# EAGLE board MPR121-Cap-Touch-Keypad_Panel_v13a (EAGLE 7.4.0), part 1 of 2
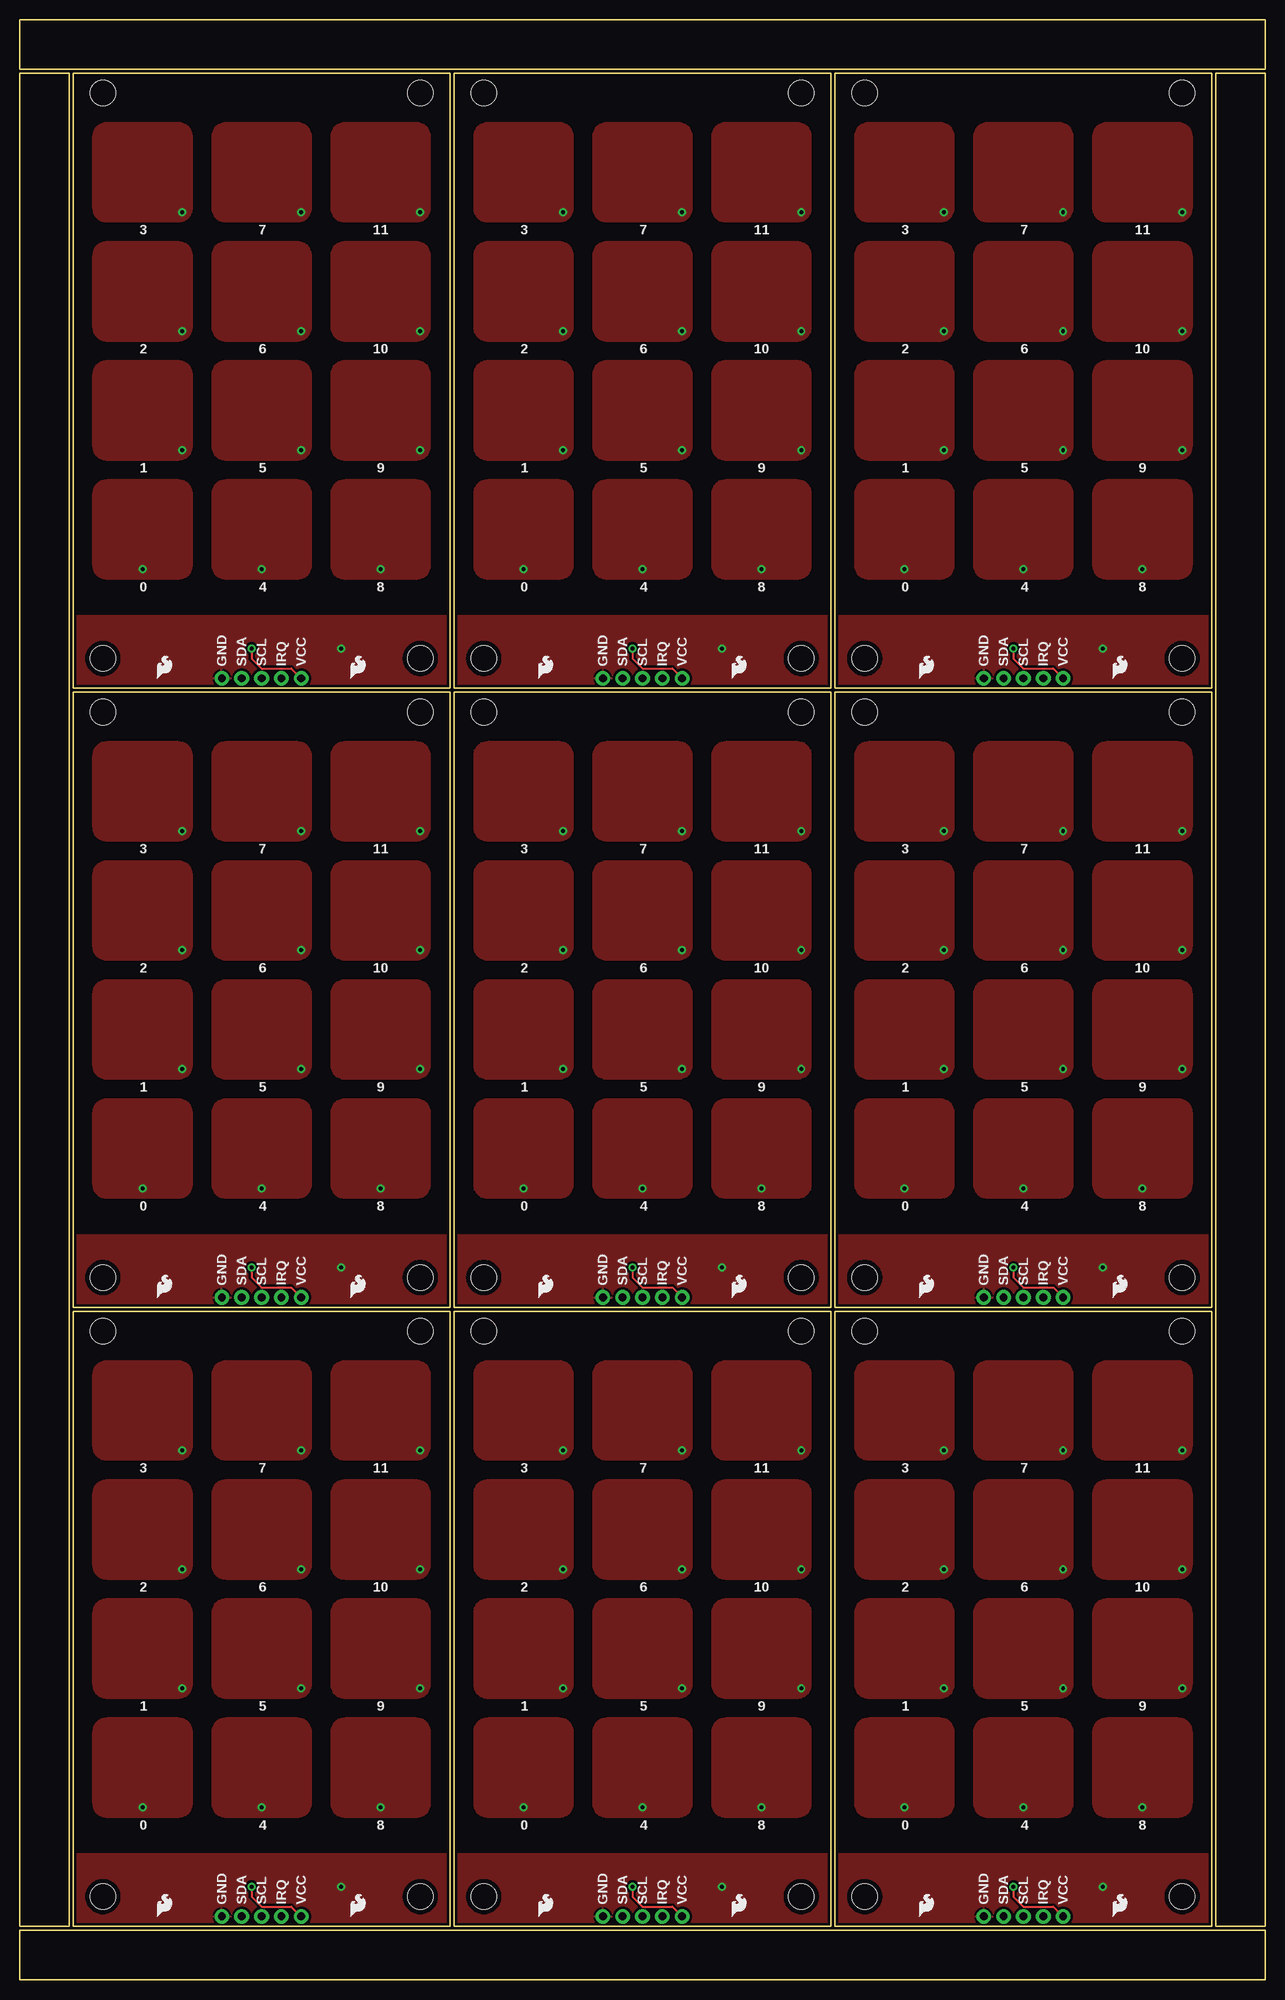
[diagram p0: board, top side]
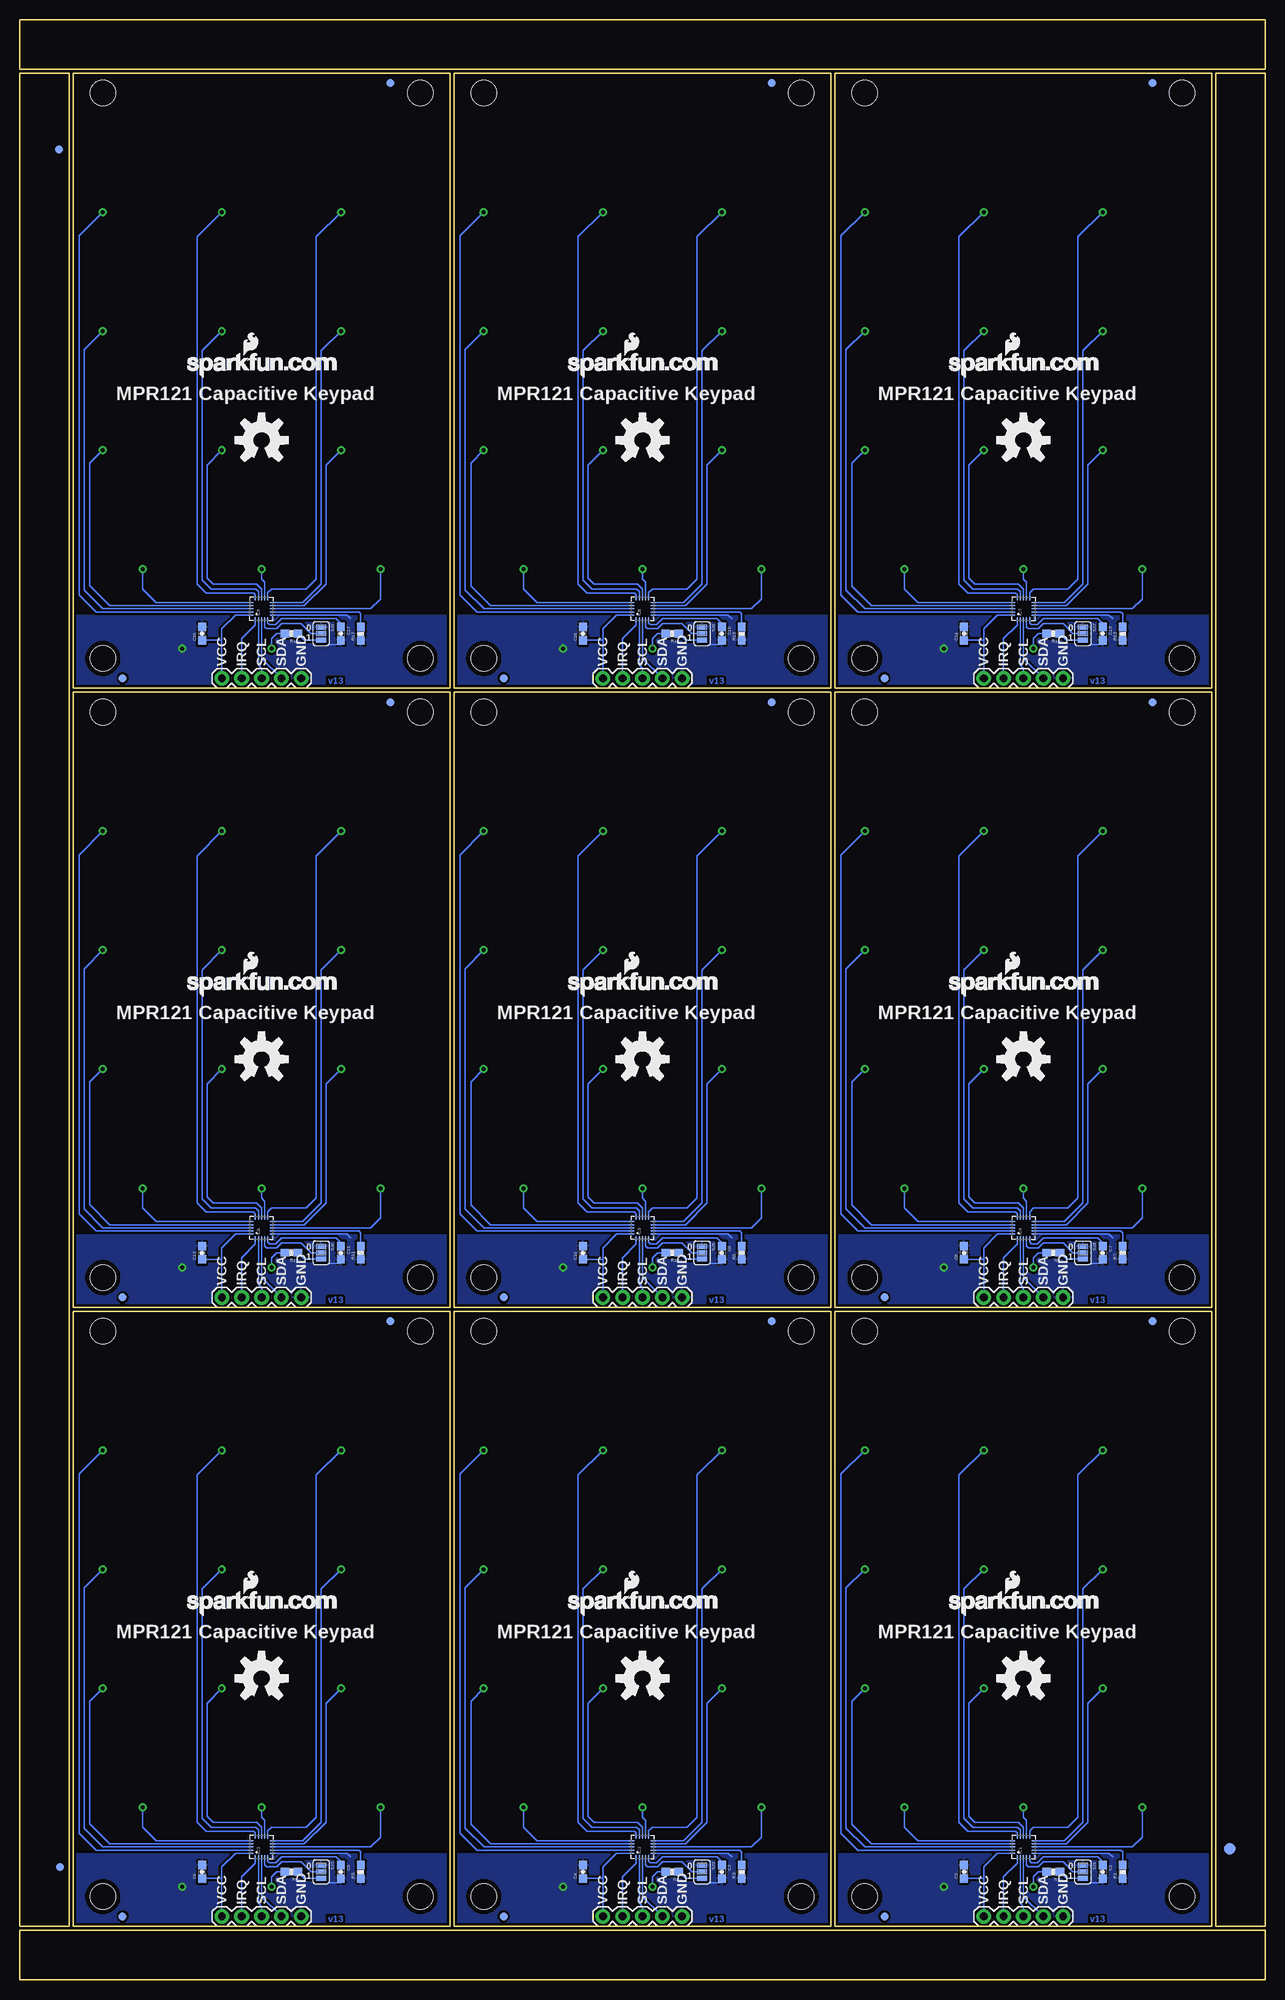
[diagram p1: board, bottom side, seen from below]

Size 159.51 x 250.95 mm. Coordinates in mm from the lower left corner, seen from the top.
Outline: 6.35,79.25 6.35,6.86 0,6.86 0,29.72
Outline: 0,27.18 0,244.09 6.35,244.09 6.35,76.71
Outline: 79.25,0 0,0 0,6.35 29.72,6.35
Outline: 27.18,6.35 159.51,6.35 159.51,0 76.71,0
Outline: 159.51,79.25 159.51,6.86 153.16,6.86 153.16,29.72
Outline: 153.16,27.18 153.16,244.09 159.51,244.09 159.51,76.71
Outline: 80.26,250.95 159.51,250.95 159.51,244.6 129.79,244.6
Outline: 132.33,244.6 0,244.6 0,250.95 82.8,250.95
Outline: 55.12,6.86 6.86,6.86 6.86,85.6 55.12,85.6 55.12,6.86
Outline: 103.89,6.86 55.63,6.86 55.63,85.6 103.89,85.6 103.89,6.86
Outline: 152.65,6.86 104.39,6.86 104.39,85.6 152.65,85.6 152.65,6.86
Outline: 55.12,86.11 6.86,86.11 6.86,164.85 55.12,164.85 55.12,86.11
Outline: 103.89,86.11 55.63,86.11 55.63,164.85 103.89,164.85 103.89,86.11
Outline: 152.65,86.11 104.39,86.11 104.39,164.85 152.65,164.85 152.65,86.11
Outline: 55.12,165.35 6.86,165.35 6.86,244.09 55.12,244.09 55.12,165.35
Outline: 103.89,165.35 55.63,165.35 55.63,244.09 103.89,244.09 103.89,165.35
Outline: 152.65,165.35 104.39,165.35 104.39,244.09 152.65,244.09 152.65,165.35
Copper layers (1*16): Top 0.035mm / dielectric 1.5mm / Bottom 0.035mm
Design rules "SparkFun *": minimum track width 8mil, minimum drill 20mil, track to track 8mil, track to pad 8mil, pad to pad 8mil, via to via 8mil, smd to smd 8mil, copper to edge 8mil, drill to drill 8mil, minimum pad ring 12mil, minimum via ring 10mil, stop-mask expansion 4mil, vias tented up to drill 20mil, thermal gap 10mil

## Footprints (pad centres in the part's own frame; a part is rotated, then mirrored left to right if it is on the bottom)
0603-CAP = smd 1.1 x 1: 1 -0.85,0; 2 0.85,0
FIDUCIAL-1X2 = smd 1 x 1: 1 0,0
FIDUCIAL-1.5X3 = smd 1.5 x 1.5: 1 0,0
QFN-20-0.4MM-V2 = smd 0.75 x 0.195: 1 -1.367,0.8; 2 -1.367,0.4; 3 -1.367,0; 4 -1.367,-0.4; 5 -1.367,-0.8; 11 1.375,-0.8; 12 1.375,-0.4; 13 1.375,0; 14 1.375,0.4; 15 1.375,0.8 | smd 0.195 x 0.75: 6 -0.795,-1.372; 7 -0.395,-1.372; 8 0.005,-1.372; 9 0.405,-1.372; 10 0.805,-1.372; 16 0.81,1.372; 17 0.41,1.372; 18 0.01,1.372; 19 -0.39,1.372; 20 -0.79,1.372
STAND-OFF = hole 3.302: 0,0
1X05 = drill 1.016 pad 1.88: 1 0,0; 2 2.54,0; 3 5.08,0; 4 7.62,0; 5 10.16,0
0603-RES = smd 1.1 x 1: 1 -0.85,0; 2 0.85,0
SJ_3_PASTE1&2 = smd 0.635 x 1.27: 1 -0.813,0; 2 0,0; 3 0.813,0

## Placement (x,y rotation side)
C1  0.1uF  [0603-CAP]  20.83,13.84 270 bottom
C2  0.1uF  [0603-CAP]  38.61,13.84 90 bottom
C3  0.1uF  [0603-CAP]  69.6,13.84 270 bottom
C4  0.1uF  [0603-CAP]  87.38,13.84 90 bottom
C5  0.1uF  [0603-CAP]  118.36,13.84 270 bottom
C6  0.1uF  [0603-CAP]  136.14,13.84 90 bottom
C7  0.1uF  [0603-CAP]  20.83,93.09 270 bottom
C8  0.1uF  [0603-CAP]  38.61,93.09 90 bottom
C9  0.1uF  [0603-CAP]  69.6,93.09 270 bottom
C10  0.1uF  [0603-CAP]  87.38,93.09 90 bottom
C11  0.1uF  [0603-CAP]  118.36,93.09 270 bottom
C12  0.1uF  [0603-CAP]  136.14,93.09 90 bottom
C13  0.1uF  [0603-CAP]  20.83,172.34 270 bottom
C14  0.1uF  [0603-CAP]  38.61,172.34 90 bottom
C15  0.1uF  [0603-CAP]  69.6,172.34 270 bottom
C16  0.1uF  [0603-CAP]  87.38,172.34 90 bottom
C17  0.1uF  [0603-CAP]  118.36,172.34 270 bottom
C18  0.1uF  [0603-CAP]  136.14,172.34 90 bottom
E$1  [FIDUCIAL-1X2]  154.31,14.48 0 bottom
E$2  [FIDUCIAL-1.5X3]  4.57,16.76 0 bottom
E$7  [FIDUCIAL-1X2]  154.43,234.31 90 bottom
IC1  MPR121  [QFN-20-0.4MM-V2]  30.99,17.02 90 bottom
IC2  MPR121  [QFN-20-0.4MM-V2]  79.76,17.02 90 bottom
IC3  MPR121  [QFN-20-0.4MM-V2]  128.52,17.02 90 bottom
IC4  MPR121  [QFN-20-0.4MM-V2]  30.99,96.27 90 bottom
IC5  MPR121  [QFN-20-0.4MM-V2]  79.76,96.27 90 bottom
IC6  MPR121  [QFN-20-0.4MM-V2]  128.52,96.27 90 bottom
IC7  MPR121  [QFN-20-0.4MM-V2]  30.99,175.51 90 bottom
IC8  MPR121  [QFN-20-0.4MM-V2]  79.76,175.51 90 bottom
IC9  MPR121  [QFN-20-0.4MM-V2]  128.52,175.51 90 bottom
JP1  LOGO-SFENEW  [SFE-NEW-WEBLOGO]  40.51,46.61 0 bottom
JP2  LOGO-SFESK  [SFE-LOGO-FLAME]  17.65,8.13 0 top
JP3  STAND-OFF  [STAND-OFF]  51.31,10.67 0 bottom
JP4  STAND-OFF  [STAND-OFF]  10.67,10.67 0 bottom
JP5  FIDUCIAL1X2  [FIDUCIAL-1X2]  14.48,84.33 0 bottom
JP6  LOGO-SFESK  [SFE-LOGO-FLAME]  42.42,8.13 0 top
JP7  STAND-OFF  [STAND-OFF]  51.31,83.06 0 bottom
JP8  STAND-OFF  [STAND-OFF]  10.67,83.06 0 bottom
JP9  [1X05]  25.91,8.13 180 bottom
JP10  FIDUCIAL1X2  [FIDUCIAL-1X2]  48.77,8.13 0 bottom
JP11  LOGO-SFENEW  [SFE-NEW-WEBLOGO]  89.28,46.61 0 bottom
JP12  STAND-OFF  [STAND-OFF]  100.08,10.67 0 bottom
JP13  STAND-OFF  [STAND-OFF]  59.44,10.67 0 bottom
JP14  LOGO-SFESK  [SFE-LOGO-FLAME]  66.42,8.13 0 top
JP15  LOGO-SFESK  [SFE-LOGO-FLAME]  91.19,8.13 0 top
JP16  STAND-OFF  [STAND-OFF]  100.08,83.06 0 bottom
JP17  STAND-OFF  [STAND-OFF]  59.44,83.06 0 bottom
JP18  [1X05]  74.68,8.13 180 bottom
JP19  FIDUCIAL1X2  [FIDUCIAL-1X2]  63.25,84.33 0 bottom
JP20  FIDUCIAL1X2  [FIDUCIAL-1X2]  97.54,8.13 0 bottom
JP21  LOGO-SFENEW  [SFE-NEW-WEBLOGO]  138.05,46.61 0 bottom
JP22  STAND-OFF  [STAND-OFF]  148.84,10.67 0 bottom
JP23  STAND-OFF  [STAND-OFF]  108.2,10.67 0 bottom
JP24  LOGO-SFESK  [SFE-LOGO-FLAME]  115.19,8.13 0 top
JP25  LOGO-SFESK  [SFE-LOGO-FLAME]  139.95,8.13 0 top
JP26  STAND-OFF  [STAND-OFF]  148.84,83.06 0 bottom
JP27  STAND-OFF  [STAND-OFF]  108.2,83.06 0 bottom
JP28  [1X05]  123.44,8.13 180 bottom
JP29  FIDUCIAL1X2  [FIDUCIAL-1X2]  112.01,84.33 0 bottom
JP30  FIDUCIAL1X2  [FIDUCIAL-1X2]  146.3,8.13 0 bottom
JP31  LOGO-SFENEW  [SFE-NEW-WEBLOGO]  40.51,125.86 0 bottom
JP32  STAND-OFF  [STAND-OFF]  51.31,89.92 0 bottom
JP33  STAND-OFF  [STAND-OFF]  10.67,89.92 0 bottom
JP34  LOGO-SFESK  [SFE-LOGO-FLAME]  17.65,87.38 0 top
JP35  LOGO-SFESK  [SFE-LOGO-FLAME]  42.42,87.38 0 top
JP36  STAND-OFF  [STAND-OFF]  51.31,162.31 0 bottom
JP37  STAND-OFF  [STAND-OFF]  10.67,162.31 0 bottom
JP38  [1X05]  25.91,87.38 180 bottom
JP39  FIDUCIAL1X2  [FIDUCIAL-1X2]  14.48,163.58 0 bottom
JP40  FIDUCIAL1X2  [FIDUCIAL-1X2]  48.77,87.38 0 bottom
JP41  LOGO-SFENEW  [SFE-NEW-WEBLOGO]  89.28,125.86 0 bottom
JP42  STAND-OFF  [STAND-OFF]  100.08,89.92 0 bottom
JP43  STAND-OFF  [STAND-OFF]  59.44,89.92 0 bottom
JP44  LOGO-SFESK  [SFE-LOGO-FLAME]  66.42,87.38 0 top
JP45  LOGO-SFESK  [SFE-LOGO-FLAME]  91.19,87.38 0 top
JP46  STAND-OFF  [STAND-OFF]  100.08,162.31 0 bottom
JP47  STAND-OFF  [STAND-OFF]  59.44,162.31 0 bottom
JP48  [1X05]  74.68,87.38 180 bottom
JP49  FIDUCIAL1X2  [FIDUCIAL-1X2]  63.25,163.58 0 bottom
JP50  FIDUCIAL1X2  [FIDUCIAL-1X2]  97.54,87.38 0 bottom
JP51  LOGO-SFENEW  [SFE-NEW-WEBLOGO]  138.05,125.86 0 bottom
JP52  STAND-OFF  [STAND-OFF]  148.84,89.92 0 bottom
JP53  STAND-OFF  [STAND-OFF]  108.2,89.92 0 bottom
JP54  LOGO-SFESK  [SFE-LOGO-FLAME]  115.19,87.38 0 top
JP55  LOGO-SFESK  [SFE-LOGO-FLAME]  139.95,87.38 0 top
JP56  STAND-OFF  [STAND-OFF]  148.84,162.31 0 bottom
JP57  STAND-OFF  [STAND-OFF]  108.2,162.31 0 bottom
JP58  [1X05]  123.44,87.38 180 bottom
JP59  FIDUCIAL1X2  [FIDUCIAL-1X2]  112.01,163.58 0 bottom
JP60  FIDUCIAL1X2  [FIDUCIAL-1X2]  146.3,87.38 0 bottom
JP61  LOGO-SFENEW  [SFE-NEW-WEBLOGO]  40.51,205.1 0 bottom
JP62  STAND-OFF  [STAND-OFF]  51.31,169.16 0 bottom
JP63  STAND-OFF  [STAND-OFF]  10.67,169.16 0 bottom
JP64  LOGO-SFESK  [SFE-LOGO-FLAME]  17.65,166.62 0 top
JP65  LOGO-SFESK  [SFE-LOGO-FLAME]  42.42,166.62 0 top
JP66  STAND-OFF  [STAND-OFF]  51.31,241.55 0 bottom
JP67  STAND-OFF  [STAND-OFF]  10.67,241.55 0 bottom
JP68  [1X05]  25.91,166.62 180 bottom
JP69  FIDUCIAL1X2  [FIDUCIAL-1X2]  14.48,242.82 0 bottom
JP70  FIDUCIAL1X2  [FIDUCIAL-1X2]  48.77,166.62 0 bottom
JP71  LOGO-SFENEW  [SFE-NEW-WEBLOGO]  89.28,205.1 0 bottom
JP72  STAND-OFF  [STAND-OFF]  100.08,169.16 0 bottom
JP73  STAND-OFF  [STAND-OFF]  59.44,169.16 0 bottom
JP74  LOGO-SFESK  [SFE-LOGO-FLAME]  66.42,166.62 0 top
JP75  LOGO-SFESK  [SFE-LOGO-FLAME]  91.19,166.62 0 top
JP76  STAND-OFF  [STAND-OFF]  100.08,241.55 0 bottom
JP77  STAND-OFF  [STAND-OFF]  59.44,241.55 0 bottom
JP78  [1X05]  74.68,166.62 180 bottom
JP79  FIDUCIAL1X2  [FIDUCIAL-1X2]  63.25,242.82 0 bottom
JP80  FIDUCIAL1X2  [FIDUCIAL-1X2]  97.54,166.62 0 bottom
JP81  LOGO-SFENEW  [SFE-NEW-WEBLOGO]  138.05,205.1 0 bottom
JP82  STAND-OFF  [STAND-OFF]  148.84,169.16 0 bottom
JP83  STAND-OFF  [STAND-OFF]  108.2,169.16 0 bottom
JP84  LOGO-SFESK  [SFE-LOGO-FLAME]  115.19,166.62 0 top
JP85  LOGO-SFESK  [SFE-LOGO-FLAME]  139.95,166.62 0 top
JP86  STAND-OFF  [STAND-OFF]  148.84,241.55 0 bottom
JP87  STAND-OFF  [STAND-OFF]  108.2,241.55 0 bottom
JP88  [1X05]  123.44,166.62 180 bottom
JP89  FIDUCIAL1X2  [FIDUCIAL-1X2]  112.01,242.82 0 bottom
JP90  FIDUCIAL1X2  [FIDUCIAL-1X2]  146.3,166.62 0 bottom
LOGO1  OSHW-LOGOL  [OSHW-LOGO-L]  30.99,38.61 0 bottom
LOGO2  OSHW-LOGOL  [OSHW-LOGO-L]  79.76,38.61 0 bottom
LOGO3  OSHW-LOGOL  [OSHW-LOGO-L]  128.52,38.61 0 bottom
LOGO4  OSHW-LOGOL  [OSHW-LOGO-L]  30.99,117.86 0 bottom
LOGO5  OSHW-LOGOL  [OSHW-LOGO-L]  79.76,117.86 0 bottom
LOGO6  OSHW-LOGOL  [OSHW-LOGO-L]  128.52,117.86 0 bottom
LOGO7  OSHW-LOGOL  [OSHW-LOGO-L]  30.99,197.1 0 bottom
LOGO8  OSHW-LOGOL  [OSHW-LOGO-L]  79.76,197.1 0 bottom
LOGO9  OSHW-LOGOL  [OSHW-LOGO-L]  128.52,197.1 0 bottom
R1  75k  [0603-RES]  18.29,13.84 90 bottom
R2  10K  [0603-RES]  27.18,13.84 180 bottom
R3  75k  [0603-RES]  67.06,13.84 90 bottom
R4  10K  [0603-RES]  75.95,13.84 180 bottom
R5  75k  [0603-RES]  115.82,13.84 90 bottom
R6  10K  [0603-RES]  124.71,13.84 180 bottom
R7  75k  [0603-RES]  18.29,93.09 90 bottom
R8  10K  [0603-RES]  27.18,93.09 180 bottom
R9  75k  [0603-RES]  67.06,93.09 90 bottom
R10  10K  [0603-RES]  75.95,93.09 180 bottom
R11  75k  [0603-RES]  115.82,93.09 90 bottom
R12  10K  [0603-RES]  124.71,93.09 180 bottom
R13  75k  [0603-RES]  18.29,172.34 90 bottom
R14  10K  [0603-RES]  27.18,172.34 180 bottom
R15  75k  [0603-RES]  67.06,172.34 90 bottom
R16  10K  [0603-RES]  75.95,172.34 180 bottom
R17  75k  [0603-RES]  115.82,172.34 90 bottom
R18  10K  [0603-RES]  124.71,172.34 180 bottom
SJ1  [SJ_3_PASTE1&2]  23.37,13.84 270 bottom
SJ2  [SJ_3_PASTE1&2]  72.14,13.84 270 bottom
SJ3  [SJ_3_PASTE1&2]  120.9,13.84 270 bottom
SJ4  [SJ_3_PASTE1&2]  23.37,93.09 270 bottom
SJ5  [SJ_3_PASTE1&2]  72.14,93.09 270 bottom
SJ6  [SJ_3_PASTE1&2]  120.9,93.09 270 bottom
SJ7  [SJ_3_PASTE1&2]  23.37,172.34 270 bottom
SJ8  [SJ_3_PASTE1&2]  72.14,172.34 270 bottom
SJ9  [SJ_3_PASTE1&2]  120.9,172.34 270 bottom

## Library data of the parts
C1-C18 = SparkFun-Capacitors; PROD_ID: CAP-00810
E$1 E$7 LOGO1-LOGO9 = SparkFun-Aesthetics
E$2 = SparkFun-Retired
IC1-IC9 = SparkFun-Sensors
JP1-JP90 R1 R3 R5 R7 R9 R11 R13 R15 R17 = SparkFun
R2 R4 R6 R8 R10 R12 R14 R16 R18 = SparkFun-Resistors; PROD_ID: RES-00824
SJ1-SJ9 = SparkFun-Passives

## Nets
GND: C1.2 C2.2 IC1.6 JP9.1 R1.1 SJ1.1
GND1: C3.2 C4.2 IC2.6 JP18.1 R3.1 SJ2.1
GND2: C5.2 C6.2 IC3.6 JP28.1 R5.1 SJ3.1
GND3: C7.2 C8.2 IC4.6 JP38.1 R7.1 SJ4.1
GND4: C9.2 C10.2 IC5.6 JP48.1 R9.1 SJ5.1
GND5: C11.2 C12.2 IC6.6 JP58.1 R11.1 SJ6.1
GND6: C13.2 C14.2 IC7.6 JP68.1 R13.1 SJ7.1
GND7: C15.2 C16.2 IC8.6 JP78.1 R15.1 SJ8.1
GND8: C17.2 C18.2 IC9.6 JP88.1 R17.1 SJ9.1
KEY0: IC1.8
KEY1: IC1.9
KEY2: IC1.10
KEY3: IC1.11
KEY4: IC1.12
KEY5: IC1.13
KEY6: IC1.14
KEY7: IC1.15
KEY8: IC1.16
KEY9: IC1.17
KEY10: IC1.18
KEY11: IC1.19
KEY12: IC2.19
KEY13: IC2.18
KEY14: IC2.17
KEY15: IC2.16
KEY16: IC2.15
KEY17: IC2.14
KEY18: IC2.13
KEY19: IC2.12
KEY20: IC2.11
KEY21: IC2.10
KEY22: IC2.9
KEY23: IC2.8
KEY24: IC3.19
KEY25: IC3.18
KEY26: IC3.17
KEY27: IC3.16
KEY28: IC3.15
KEY29: IC3.14
KEY30: IC3.13
KEY31: IC3.12
KEY32: IC3.11
KEY33: IC3.10
KEY34: IC3.9
KEY35: IC3.8
KEY36: IC4.19
KEY37: IC4.18
KEY38: IC4.17
KEY39: IC4.16
KEY40: IC4.15
KEY41: IC4.14
KEY42: IC4.13
KEY43: IC4.12
KEY44: IC4.11
KEY45: IC4.10
KEY46: IC4.9
KEY47: IC4.8
KEY48: IC5.19
KEY49: IC5.18
KEY50: IC5.17
KEY51: IC5.16
KEY52: IC5.15
KEY53: IC5.14
KEY54: IC5.13
KEY55: IC5.12
KEY56: IC5.11
KEY57: IC5.10
KEY58: IC5.9
KEY59: IC5.8
KEY60: IC6.19
KEY61: IC6.18
KEY62: IC6.17
KEY63: IC6.16
KEY64: IC6.15
KEY65: IC6.14
KEY66: IC6.13
KEY67: IC6.12
KEY68: IC6.11
KEY69: IC6.10
KEY70: IC6.9
KEY71: IC6.8
KEY72: IC7.19
KEY73: IC7.18
KEY74: IC7.17
KEY75: IC7.16
KEY76: IC7.15
KEY77: IC7.14
KEY78: IC7.13
KEY79: IC7.12
KEY80: IC7.11
KEY81: IC7.10
KEY82: IC7.9
KEY83: IC7.8
KEY84: IC8.19
KEY85: IC8.18
KEY86: IC8.17
KEY87: IC8.16
KEY88: IC8.15
KEY89: IC8.14
KEY90: IC8.13
KEY91: IC8.12
KEY92: IC8.11
KEY93: IC8.10
KEY94: IC8.9
KEY95: IC8.8
KEY96: IC9.19
KEY97: IC9.18
KEY98: IC9.17
KEY99: IC9.16
KEY100: IC9.15
KEY101: IC9.14
KEY102: IC9.13
KEY103: IC9.12
KEY104: IC9.11
KEY105: IC9.10
KEY106: IC9.9
KEY107: IC9.8
N$1: IC1.4 SJ1.2
N$2: R2.1 SJ1.3
N$3: IC2.4 SJ2.2
N$4: R4.1 SJ2.3
N$5: IC3.4 SJ3.2
N$6: R6.1 SJ3.3
N$7: IC4.4 SJ4.2
N$8: R8.1 SJ4.3
N$9: IC5.4 SJ5.2
N$10: R10.1 SJ5.3
N$11: IC6.4 SJ6.2
N$12: R12.1 SJ6.3
N$13: IC7.4 SJ7.2
N$14: R14.1 SJ7.3
N$15: IC8.4 SJ8.2
N$16: R16.1 SJ8.3
N$17: IC9.4 SJ9.2
N$18: R18.1 SJ9.3
REXT: IC1.7 R1.2
REXT1: IC2.7 R3.2
REXT2: IC3.7 R5.2
REXT3: IC4.7 R7.2
REXT4: IC5.7 R9.2
REXT5: IC6.7 R11.2
REXT6: IC7.7 R13.2
REXT7: IC8.7 R15.2
REXT8: IC9.7 R17.2
SCL: IC1.2 JP9.3
SCL1: IC2.2 JP18.3
SCL2: IC3.2 JP28.3
SCL3: IC4.2 JP38.3
SCL4: IC5.2 JP48.3
SCL5: IC6.2 JP58.3
SCL6: IC7.2 JP68.3
SCL7: IC8.2 JP78.3
SCL8: IC9.2 JP88.3
SDA: IC1.3 JP9.2
SDA1: IC2.3 JP18.2
SDA2: IC3.3 JP28.2
SDA3: IC4.3 JP38.2
SDA4: IC5.3 JP48.2
SDA5: IC6.3 JP58.2
SDA6: IC7.3 JP68.2
SDA7: IC8.3 JP78.2
SDA8: IC9.3 JP88.2
VCC: C2.1 IC1.20 JP9.5 R2.2
VCC1: C4.1 IC2.20 JP18.5 R4.2
VCC2: C6.1 IC3.20 JP28.5 R6.2
VCC3: C8.1 IC4.20 JP38.5 R8.2
VCC4: C10.1 IC5.20 JP48.5 R10.2
VCC5: C12.1 IC6.20 JP58.5 R12.2
VCC6: C14.1 IC7.20 JP68.5 R14.2
VCC7: C16.1 IC8.20 JP78.5 R16.2
VCC8: C18.1 IC9.20 JP88.5 R18.2
VREG: C1.1 IC1.5
VREG1: C3.1 IC2.5
VREG2: C5.1 IC3.5
VREG3: C7.1 IC4.5
VREG4: C9.1 IC5.5
VREG5: C11.1 IC6.5
VREG6: C13.1 IC7.5
VREG7: C15.1 IC8.5
VREG8: C17.1 IC9.5
~IRQ: IC1.1 JP9.4
~IRQ1: IC2.1 JP18.4
~IRQ2: IC3.1 JP28.4
~IRQ3: IC4.1 JP38.4
~IRQ4: IC5.1 JP48.4
~IRQ5: IC6.1 JP58.4
~IRQ6: IC7.1 JP68.4
~IRQ7: IC8.1 JP78.4
~IRQ8: IC9.1 JP88.4